# Altium PCB ArduinoUnoShield.PcbDoc
Units mil, origin at the board's own origin, x right, y up, seen from the top; angles counter-clockwise.
Board outline 2700 x 2100 mil, 2 copper layers (Top Layer, Bottom Layer); 25 components, 41 nets, 95 pads, 20 vias.
Unrouted connection lines stored in the file: 2.
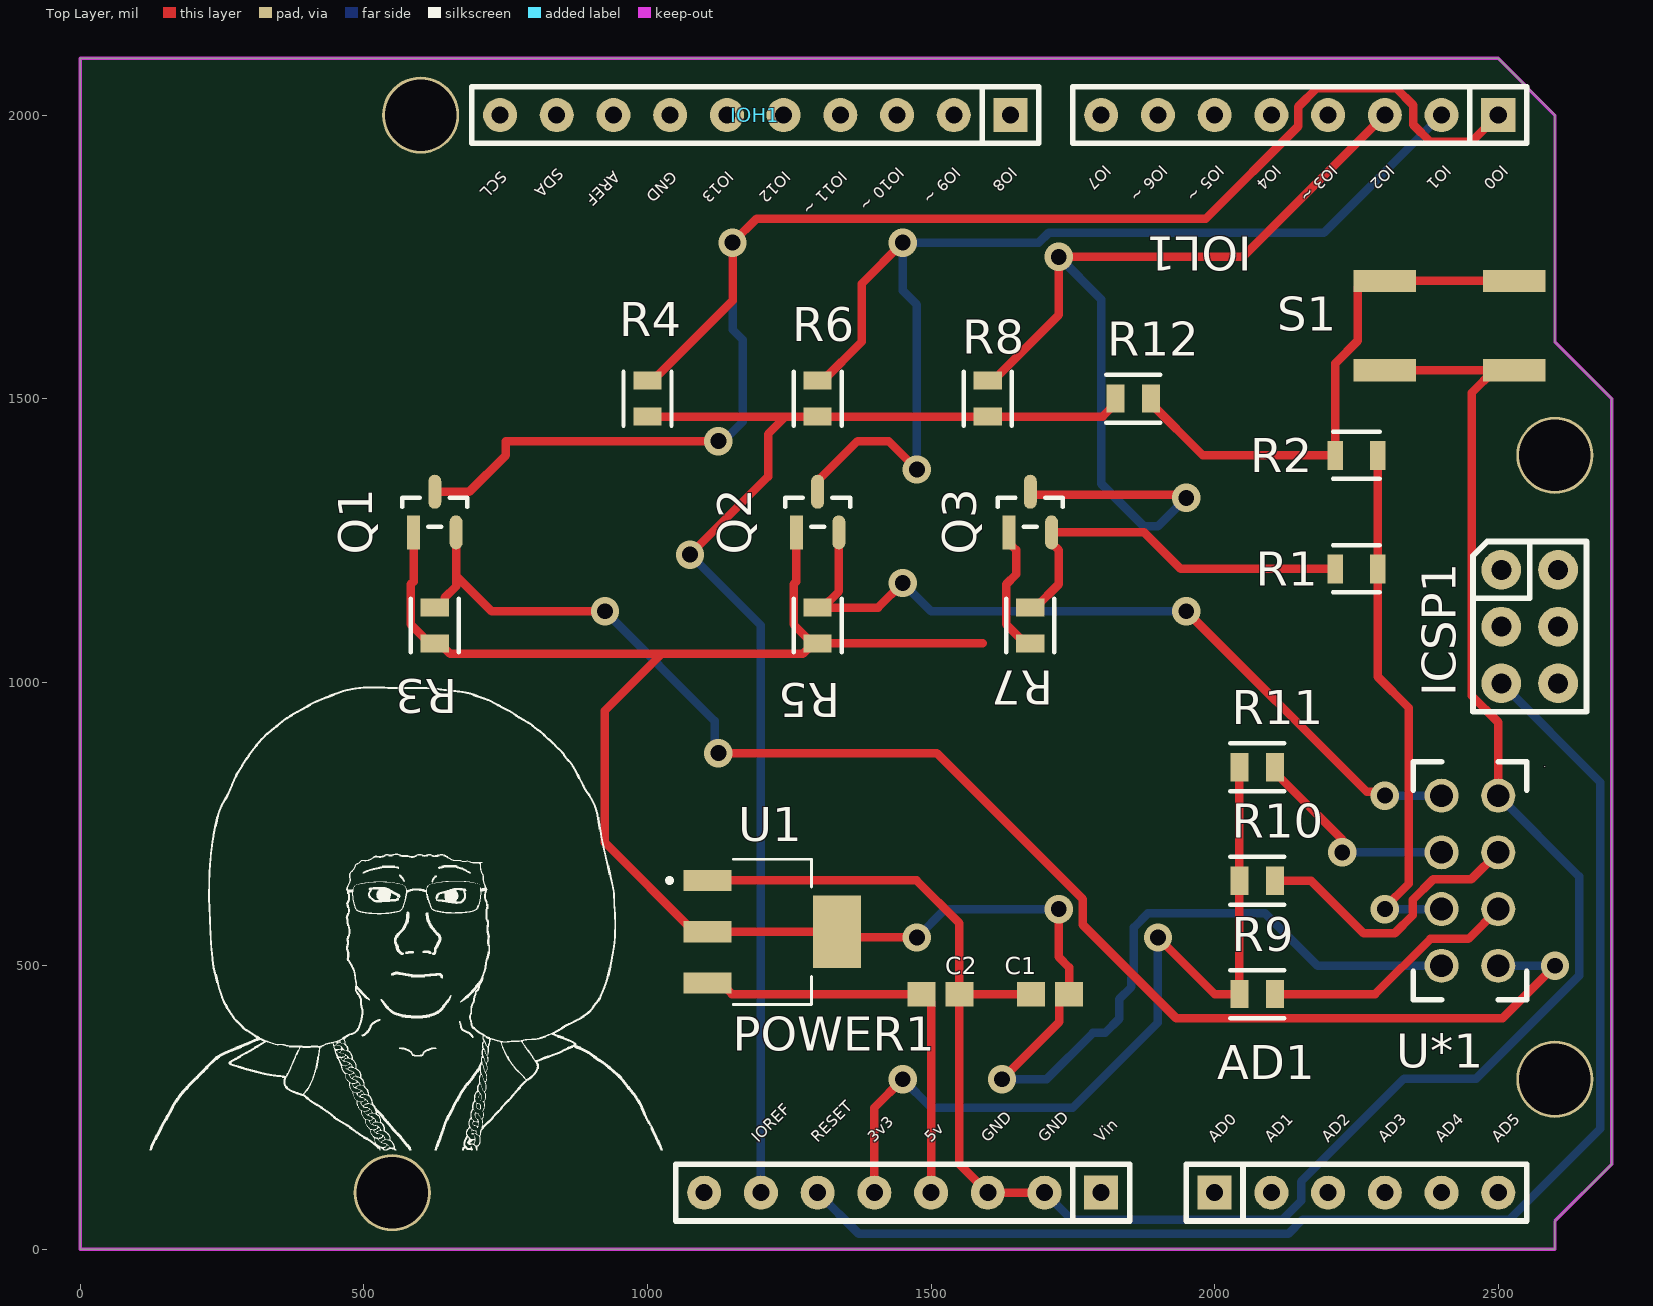
[diagram p0: Top Layer view]
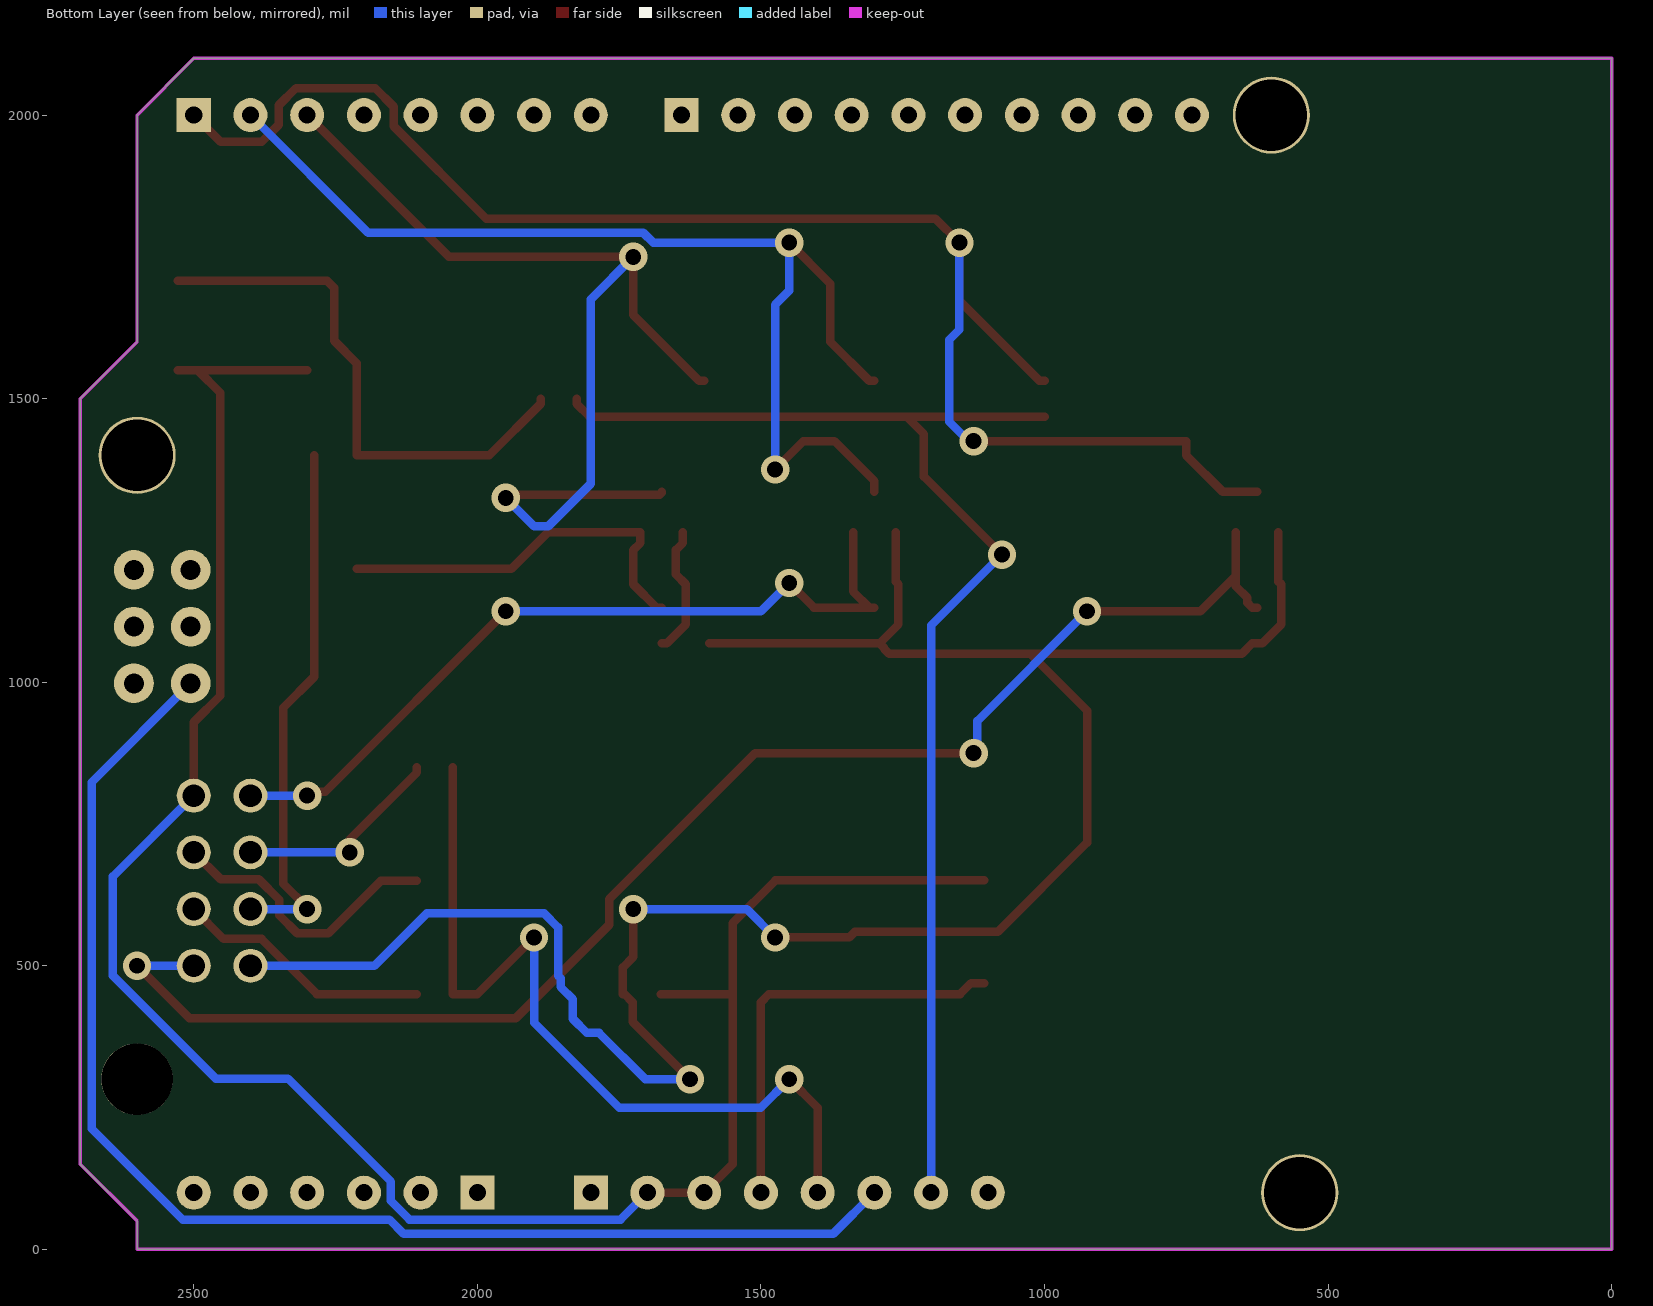
[diagram p1: Bottom Layer view, seen from below]
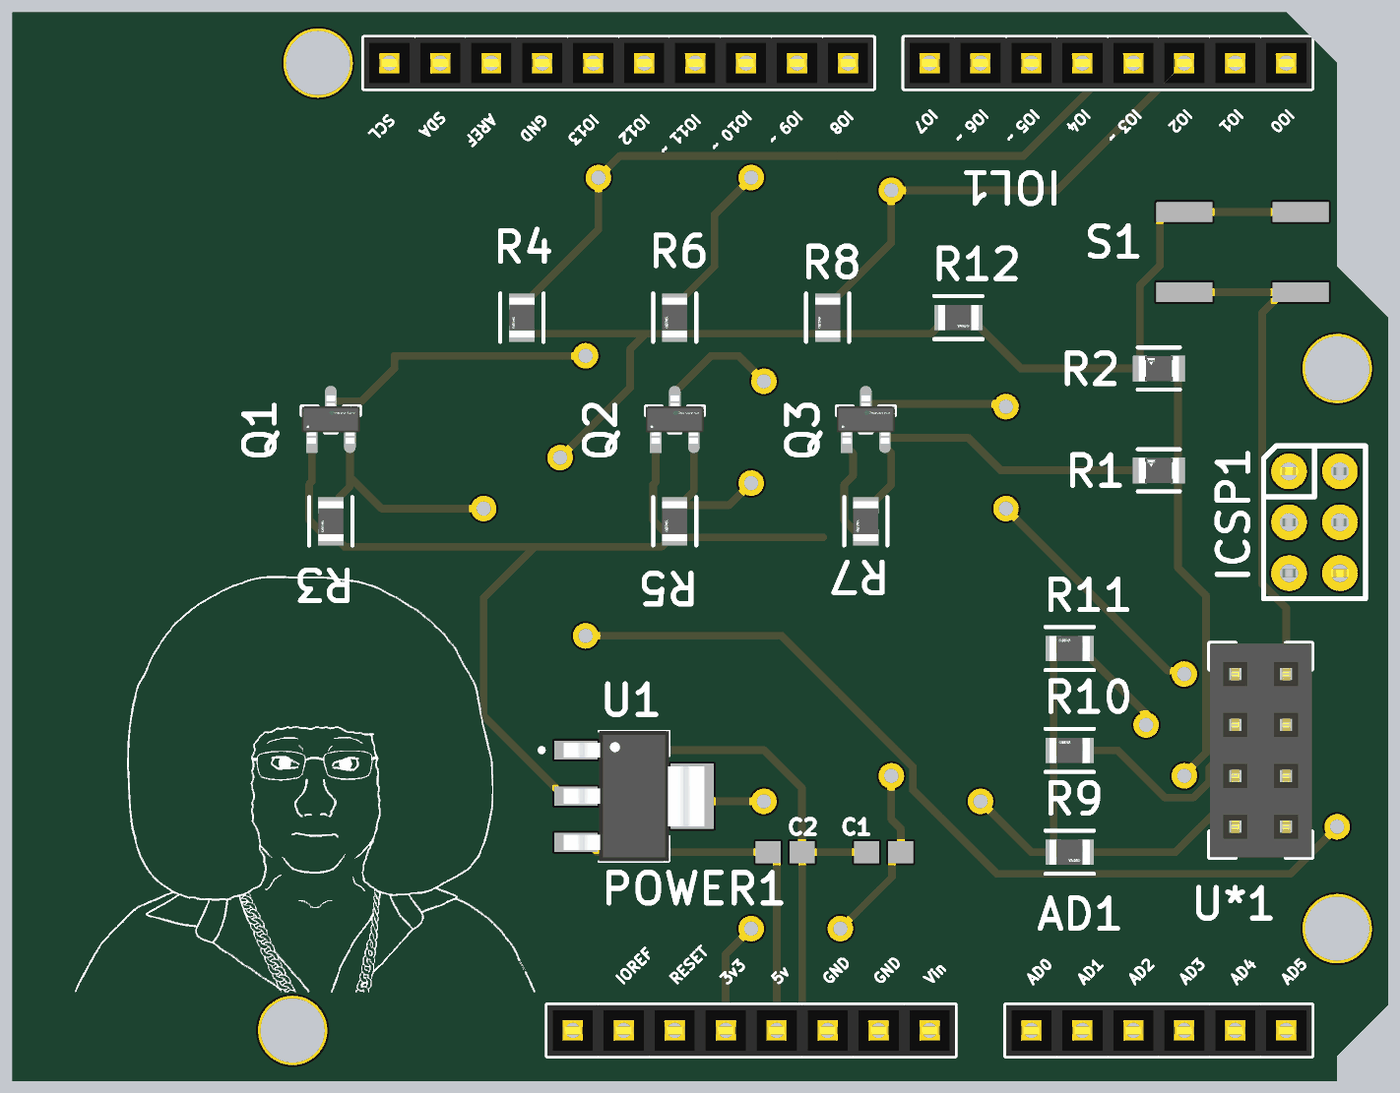
[diagram p2: 3D render of the assembled board from above, using the file's embedded part models]

## Layer stack, top to bottom
Top Solder: solder mask 0.4, Solder Resist, Dk 3.5
Top Layer: signal copper 1.4
Dielectric1: dielectric 12.6, FR-4, Dk 4.8
Bottom Layer: signal copper 1.4
Bottom Solder: solder mask 0.4, Solder Resist, Dk 3.5

## Board outline
0,0 0,2100 2500,2100 2600,2000 2600,1600 2700,1500 2700,150 2600,50 2600,0

## Design rules (kind name [scope] priority, off if disabled: settings)
Clearance [All] p1: gap=10 ignorepadtopadclearanceinfootprint=FALSE except(0: Arc-Hole Track-Hole SMDPad-Hole THPad-Hole Via-Hole Fill-Hole Poly-Hole Region-Hole Text-Hole)
HoleSize [All] p1: absolutevalues=TRUE maxlimit=150 minlimit=1 maxpercent=80.000 minpercent=20.000
PolygonConnect [All] p1: connectstyle=Relief reliefconductorwidth=10 reliefentries=4 polygonreliefangle="90 Angle" airgapwidth=10
RoutingVias [All] p1: holewidth=28 width=50 viastyle="Through Hole" minholewidth=28 minwidth=50 maxholewidth=28 maxwidth=50
SilkToSolderMaskClearance SilkscreenOverComponentPads [IsPad] p1: minsilkscreentomaskgap=10 clearancetoexposedcopper=TRUE
SolderMaskExpansion [All] p1: expansion=4 istentingtop=FALSE
SupplyNets "Schematic Supply Nets" [InNet('GND')] p1: voltage=0.000
Width [All] p1: maxlimit=20 minlimit=10 preferedwidth=15 minimp=50.000000 maximp=50.000000 favimp=50.000000
28 further rules are at their usual default settings.

## Classes and differential pairs
component class ArduinoUnoShield: IOH

## Components (designator, comment, footprint, x,y, rotation, side; value= is the part's Value field where it differs from the comment)
AD1 "AD" "Header 6x1 8.5mm" 2000,100 r0 top locked
C1 "C0603C105M9PACTU" CAPC1608X90X35ML15T15 1710,450 r0 top
C2 "C0603C105M9PACTU" CAPC1608X90X35ML15T15 1516.54,450 r180 top
ICSP1 "ICSP" ICSP 2505.51,1198.03 r0 top locked
IOH1 "IOH" "Header 10x1 8.5mm" 1640,2000 r180 top locked
IOL1 "IOL" "Header 8x1 8.5mm" 2500,2000 r180 top locked
POWER1 "POWER_UNO" "Header 8x1 8.5mm" 1800,100 r180 top locked
Q1 "BSS138" FP-318-08-IPC_B 625,1300 r90 top
Q2 "BSS138" FP-318-08-IPC_B 1300,1300 r90 top
Q3 "BSS138" FP-318-08-IPC_B 1675,1300 r90 top
R1 "CRCW08050000Z0ECC" FP-CRCW0805-Ce3-MFG 2250,1200 r0 top
R2 "CRCW08050000Z0ECC" FP-CRCW0805-Ce3-MFG 2250,1400 r0 top
R3 "AT0805BRE0710KL" FP-AT0805-IPC_C 625,1100 r270 top
R4 "AT0805BRE0710KL" FP-AT0805-IPC_C 1000,1500 r270 top
R5 "AT0805BRE0710KL" FP-AT0805-IPC_C 1300,1100 r270 top
R6 "AT0805BRE0710KL" FP-AT0805-IPC_C 1300,1500 r270 top
R7 "AT0805BRE0710KL" FP-AT0805-IPC_C 1675,1100 r270 top
R8 "AT0805BRE0710KL" FP-AT0805-IPC_C 1600,1500 r270 top
R9 "AT0805BRE0710KL" FP-AT0805-IPC_C 2075,450 r0 top
R10 "AT0805BRE0710KL" FP-AT0805-IPC_C 2075,650 r180 top
R11 "AT0805BRE0710KL" FP-AT0805-IPC_C 2075,850 r180 top
R12 "AT0805BRE0710KL" FP-AT0805-IPC_C 1856.57,1500 r0 top
S1 "KSC221J" "ITT Cannon KSC2 Series" 2300,1550 r0 top
U1 "TLV1117LV33DCYR" VREG_TLV1117LV33DCYR 1220,560 r0 top
U*1 "ESP8266 Module" "Copy of ESP8266 2x4 Connector" 2400,800 r270 top

## Footprints (in the part's own frame and the unit in brackets; to place one, negate y for a bottom-side part, rotate by r counter-clockwise, add the part's x,y. Pads: shape width x height; smd on the part's side, far side on the other; paste and mask are expansions set on the pad)
CAPC1608X90X35ML15T15 [mm] "Chip Capacitor, 2-Leads, Body 1.60x0.81mm, IPC Low Density"
  rect 1.25x1.1 smd: 1(-0.85,0) 2(0.85,0)
  body extent -0.88,-0.48 0.87,0.48, height 0.9
"Copy of ESP8266 2x4 Connector" [mil]
  round 60 hole 40: 1(0,100) 2(0,0) 3(100,100) 4(100,0) 5(200,100) 6(200,0) 7(300,100) 8(300,0)
  silkscreen extent -60,-50 360,150, body extent -60,-50 360,150, height 335
FP-318-08-IPC_B [mm]
  rect 1.524x0.578 smd paste+0 mask+0: 1(-0.91,0.95)
  rrect100% 1.524x0.578 smd paste+0 mask+0: 2(-0.91,-0.95) 3(0.91,0)
  silkscreen extent -0.65,-1.45 0.65,1.45, body extent -1.92,-1.7 1.92,1.7, height 0.25
FP-AT0805-IPC_C [mil]
  rect 31.82x49.69 smd paste+0 mask+0: 1(-31.57,0) 2(31.57,0)
  silkscreen extent -47,-42 47,42, body extent -51,-31 51,31, height 10
FP-CRCW0805-Ce3-MFG [mm]
  rect 0.7x1.3 smd paste+0 mask+0: 1(-0.95,0) 2(0.95,0)
  silkscreen extent -1.05,-1.05 1.05,1.05, body extent -1.4,-0.8 1.4,0.8, height 0.25
"Header 6x1 8.5mm" [mil] "Stackable 6 pin header"
  rect 60x60 hole 30: 1(0,0)
  round 60 hole 30: 2(100,0) 3(200,0) 4(300,0) 5(400,0) 6(500,0)
  silkscreen extent -50,-50 550,50, body extent -50,-50 550,50, height 335
"Header 8x1 8.5mm" [mil] "Stackable 8 pin header"
  rect 60x60 hole 30: 1(0,0)
  round 60 hole 30: 2(100,0) 3(200,0) 4(300,0) 5(400,0) 6(500,0) 7(600,0) 8(700,0)
  silkscreen extent -50,-50 750,50, body extent -50,-50 750,50, height 335
"Header 10x1 8.5mm" [mil] "Stackable 10 pin header"
  rect 60x60 hole 30: 1(0,0)
  round 60 hole 30: 2(100,0) 3(200,0) 4(300,0) 5(400,0) 6(500,0) 7(600,0) 8(700,0) 9(800,0) 10(900,0)
  silkscreen extent -50,-50 950,50, body extent -50,-50 950,50, height 335
ICSP [mil]
  round 70 hole 35.43: 1(0,0) 2(100,0) 3(0,-100) 4(100,-100) 5(0,-200) 6(100,-200)
  silkscreen extent -50,-250 150,50, body extent -50,-250 150,50, height 485
"ITT Cannon KSC2 Series" [mm] "SWITCH TACT SILVER J-LEAD"
  rect 2.8x1 smd: 1(0,0) 1(5.8,0) 2(0,4) 2(5.8,4)
  body extent -0.5,-1.4 6.3,5.4, height 3.55
VREG_TLV1117LV33DCYR [mm]
  rect 2.15x0.95 smd: 1(-2.9,2.3) 2(-2.9,0) 3(-2.9,-2.3)
  rect 2.15x3.25 smd: 4(2.9,0)
  silkscreen extent -4.7,-3.25 1.75,3.25, body extent -3.5,-3.25 3.5,3.25, height 1.8

## Part data
AD1: Supplier Part Number 1=2699089, Supplier 1=Arrow, Supplier 2=Digi-Key, Supplier 3=Arrow, Supplier 4=Arrow, Supplier Part Number 2=SAM1198-06-ND, Supplier Part Number 3=2699088, Supplier Part Number 4=2699075
C1 C2: library part CMP-1035-02731-2, Manufacturer=Kemet, Part Number=C0603C105M9PACTU
ICSP1: Supplier Part Number 1=2699117, Supplier 1=Arrow, Supplier 2=Arrow, Supplier 3=Digi-Key, Supplier 4=Arrow, Supplier 5=Digi-Key, Supplier Part Number 2=2699116, Supplier Part Number 3=SAM1185-06-ND, Supplier Part Number 4=2699091, Supplier Part Number 5=SAM1196-06-ND
IOH1: Supplier Part Number 1=2698803S4475693N1004, Supplier 1=Arrow, Supplier 2=Digi-Key, Supplier 3=Arrow, Supplier Part Number 2=SAM1198-10-ND, Supplier Part Number 3=2698789
IOL1 POWER1: Supplier Part Number 1=SAM1198-08-ND, Supplier 1=Digi-Key, Supplier 2=Arrow, Supplier 3=Arrow, Supplier 4=Arrow, Supplier Part Number 2=2698939, Supplier Part Number 3=2698940, Supplier Part Number 4=2698925
Q1 Q2 Q3: library part CMP-07173-000101-1, "MOSFET N-CH 50V 220MA SOT-23", Case/Package=SOT-23, Continuous Drain Current (ID)=220mA, Drain to Source Breakdown Voltage=50V, Drain to Source Resistance=3.5R, Gate to Source Voltage (Vgs)=20V, Input Capacitance=27pF, Max Operating Temperature=150°C, Max Power Dissipation=360mW, Min Operating Temperature=-55°C, On-State Resistance=6R, Package Quantity=1, Threshold Voltage=1.3V, Contact Plating=Tin, Current Rating=220mA, Drain to Source Voltage (Vdss)=50V, Dual Supply Voltage=50V, Element Configuration=Single, Fall Time=9ns, Height=0.93mm, Lead Free="Lead Free", Length=2.92mm, Mount="Surface Mount", Nominal Vgs=1.3V, Number of Elements=1, Number of Pins=3, Packaging="Tape and Reel", Power Dissipation=360mW, Radiation Hardening=No, Rds On Max=3.5R, REACH SVHC="No SVHC", Rise Time=9ns, Termination=SMD/SMT, Turn-Off Delay Time=20ns, Turn-On Delay Time=2.5ns, Voltage Rating (DC)=50V, Weight=0.03g, Width=1.3mm
R1 R2: library part CMP-00030-87884303-1, "CRCW08050000Z0ECC CRCW Thick Film Commodity Chip Resistor Jumper 0805 Size 0 Ohm 0.125 W 2-Pin SMD Paper T/R", Case/Package=0805, Max Operating Temperature=155°C, Min Operating Temperature=-55°C, Power Rating=125mW, Resistance=0Ω, Voltage Rating=150V, Composition="Thick Film", Height=600µm, Lead Free="Lead Free", NexarPartId=87884303, RoHS=Compliant
R3 R4 R5 R6 R7 R8 R9 R10 R11 R12: library part CMP-03412-048709-1, "Thin Film Chip Resistors Automotive Grade 10kΩ 0.1% 50ppm/°C 0805"
S1: library part CMP-339-000013-1, "SWITCH TACT SILVER J-LEAD", Manufacturer 1="ITT Cannon", GFUPartNo=KSC221J, Manufacturer Part Number 1=KSC221J, Part Type=SMT
U1: library part CMP-550-000000-1, "1-A, low-dropout voltage regulator", Package="SOT-223-4 Texas Instruments", Check_prices=https://www.snapeda.com/parts/TLV1117LV33DCYR/Texas+Instruments/view-part/?ref=eda, Component Type=Standard, Design Item ID=TLV1117LV33DCYR, Digi-Key_Part_Number=296-28778-2-ND, MF="Texas Instruments", MP=TLV1117LV33DCYR, Pin Count=4, Purchase-URL=https://pricing.snapeda.com/search/part/TLV1117LV33DCYR/?ref=eda, SnapEDA_Link=https://www.snapeda.com/parts/TLV1117LV33DCYR/Texas+Instruments/view-part/?ref=snap, Source=TLV1117LV33DCYR.SchLib
U*1: library part CMP-006-0011-1, "ESP8266 2x4 Module", Design Item ID="ESP8266 2x4 Connector", Source=ESP8266Connector.SchLib

## Free pads (board coordinates)
  round 135.98 hole 125.98: 0(550,100) 0(600,2000) 0(2600,1400)
  round 135.98 / inner round 125.98 / far side round 125.98 hole 125.98: 0(2600,300)

## Via types
v1: diameter 50, hole 28, Top Layer to Bottom Layer, 20 vias

## Nets (pads, with @x,y where several pads share a name; then routed paths per layer and width w, separated by ;. In a path a pad name is that pad's centre, name@x,y a point inside that pad or via, vN(x,y) a via of type N, cw(c..) or ccw(c..) an arc to the next point about the centre after c; other vN are vias at no path point)
3V3: POWER1.5 R9.1 R10.2 R11.2 | length 1488.4
  Top Layer w15: POWER1.5 1400,250 v1(1450,300) ; v1(1900,550) 2000,450 R9.1 R10.2 R11.2
  Bottom Layer w15: v1(1450,300) 1500,250 1750,250 1900,400 v1(1900,550)
5V: C2.2 POWER1.4 U1.3 | length 743.9
  Top Layer w15: U1.3 1129.45,469.45 1148.9,450 C2.2 1485.85,450 1500,435.85 POWER1.4
AD0: AD1.1
AD1: AD1.2
AD2: AD1.3
AD3: AD1.4
AD4: AD1.5
AD5: AD1.6
AREF: IOH1.8
"ESP 3v3": C1.2 Q1.1 Q2.1 Q3.1 R3.2 R5.2 R7.2 U1.2 U1.4 U*1.8 | length 4281.3
  Top Layer w15: Q1.1 587.6,1177.51 582.65,1172.57 582.65,1101.83 616.06,1068.43 633.94,1068.43 652.36,1050 1025,1050 ; Q2.1 1262.6,1177.51 1257.65,1172.57 1257.65,1101.83 R5.2@1291.06,1068.43 ; v1(1475,550) 1344.17,550 U1.4 U1.2 1082.2,560 925,717.2 925,950 1025,1050 ; 1591.06,1068.43 R5.2 R5.2@1291.06,1068.43 ; v1(1625,300) 1726.36,401.36 1726.36,435.85 1740.51,450 C1.2 1743.46,497.07 1725,515.53 v1(1725,600) ; Q3.1 1637.6,1245.54 1650,1233.14 1650,1189.91 1632.65,1172.57 1632.65,1101.83 1666.06,1068.43 R7.2 ; 1025,1050 1273.87,1050 1282.65,1058.79 1282.65,1060.02 R5.2@1291.06,1068.43
  Bottom Layer w15: v1(1475,550) 1525,600 v1(1725,600) ; v1(1625,300) 1703.78,300 1785.48,381.7 1806.7,381.7 1831.7,406.7 1831.7,441.17 1853.35,462.82 1853.35,478.35 1857.5,482.5 1857.5,567.6 1882.4,592.5 2088.86,592.5 2181.36,500 U*1.8
"ESP Reset": R1.2 R2.2 U*1.6 | length 940.4
  Top Layer w15: R2.2 2287.4,1009.7 2342.5,954.6 2342.5,645.03 2300,602.53 v1(2300,600)
  Bottom Layer w15: v1(2300,600) U*1.6
GND: C1.1 C2.1 IOH1.7 POWER1.2 POWER1.3 S1.1 U1.1 U*1.1 | length 3784.5
  Top Layer w15: U1.1 1474.45,650.55 1549.74,575.26 1549.74,450.26 C2.1 ; C1.1 C2.1 ; POWER1.2 POWER1.3 1550,150 C2.1 ; S1.1@2300,1550 2528.35,1550 2492.91,1550 2453.01,1510.1 2453.01,976.29 2500,929.3 U*1.1
  Bottom Layer w15: POWER1.2 1747.5,52.5 2119.68,52.5 2152.5,85.32 2152.5,119.68 2333.86,301.04 2461.14,301.04 2642.5,482.4 2642.5,657.5 U*1.1
IO0: IOL1.1 Q1.3 R4.1 | length 2805.2
  Top Layer w15: Q1.3 685.83,1335.83 750,1400 750,1425 v1(1125,1425) ; R4.1 1008.94,1531.57 1150,1672.64 v1(1150,1775) 1192.5,1817.5 1984.68,1817.5 2147.5,1980.32 2147.5,2014.68 2180.32,2047.5 2319.68,2047.5 2350,2017.18 2350,1982.82 2380.32,1952.5 2452.5,1952.5 IOL1.1
  Bottom Layer w15: v1(1125,1425) 1133.82,1425 1168.3,1459.48 1168.3,1603.35 1150,1621.66 v1(1150,1775)
IO1: IOL1.2 Q2.3 R6.1 | length 2007.9
  Top Layer w15: Q2.3 1300,1354.46 1370.54,1425 1425,1425 v1(1475,1375) ; R6.1 1308.94,1531.57 1377.96,1600.59 1377.96,1702.96 v1(1450,1775)
  Bottom Layer w15: v1(1475,1375) 1475,1665.53 1450,1690.53 v1(1450,1775) 1689.9,1775 1707.4,1792.5 2192.5,1792.5 IOL1.2
IO2: IOL1.3 Q3.3 R8.1 | length 1867.4
  Top Layer w15: R8.1 1608.94,1531.57 1725,1647.64 v1(1725,1750) 2050,1750 IOL1.3 ; Q3.3 1675,1334 1678.58,1330.42 1944.58,1330.42 v1(1950,1325)
  Bottom Layer w15: v1(1725,1750) 1800,1675 1800,1350 1875,1275 1900,1275 v1(1950,1325)
IO3: IOL1.4
IO4: IOL1.5
IO5: IOL1.6
IO6: IOL1.7
IO7: IOL1.8
IO8: IOH1.1
IO9: IOH1.2
IO10: IOH1.3
IO11: IOH1.4
IO12: IOH1.5
IO13: IOH1.6
IOREF: POWER1.7 R4.2 R6.2 R8.2 R12.1 | length 2333.3
  Top Layer w15: R4.2 1243.43,1468.43 ; v1(1075,1225) 1212.56,1362.56 1212.56,1437.56 1243.43,1468.43 ; R12.1 1825,1491.06 1802.36,1468.43 R8.2 R6.2 1243.43,1468.43
  Bottom Layer w15: v1(1075,1225) 1200,1100 POWER1.7
"L Reset": Q3.2 R1.1 R7.1 | length 690.5
  Top Layer w15: R7.1 1683.94,1131.57 1725,1172.64 1725,1232.87 1712.4,1245.47 Q3.2 1875.73,1264.17 1939.9,1200 R1.1
"L RX": Q2.2 R5.1 U*1.2 | length 1417.7
  Top Layer w15: R5.1 R5.1@1308.94,1131.57 ; Q2.2 1337.4,1160.04 R5.1@1308.94,1131.57 ; v1(1450,1175) 1406.57,1131.57 R5.1@1308.94,1131.57 ; v1(1950,1125) 2268.3,806.7 2293.3,806.7 v1(2300,800)
  Bottom Layer w15: v1(1450,1175) 1500,1125 v1(1950,1125) ; v1(2300,800) U*1.2
"L TX": Q1.2 R3.1 U*1.7 | length 2608.1
  Top Layer w15: R3.1 633.94,1131.57 642.35,1139.98 642.35,1148.92 662.4,1168.98 662.4,1187.6 ; Q1.2 662.4,1187.6 ; v1(925,1125) 725,1125 662.4,1187.6 ; v1(1125,875) 1510.1,875 1767.5,617.6 1767.5,572.4 1932.4,407.5 2507.5,407.5 v1(2600,500)
  Bottom Layer w15: v1(925,1125) 1118.3,931.7 1118.3,881.7 v1(1125,875) ; U*1.7 v1(2600,500)
MISO: ICSP1.1
MOSI: ICSP1.4
NetR2_1: R2.1 R12.2 S1.2 | length 963.9
  Top Layer w15: R12.2 1888.15,1491.06 1979.21,1400 R2.1 2212.6,1562.15 2252.38,1601.93 2252.38,1695.29 2264.57,1707.48 2300,1707.48 S1.2@2528.35,1707.48
NetR9_2: R9.2 U*1.5 | length 455.6
  Top Layer w15: R9.2 2282.82,450 2380.32,547.5 2447.5,547.5 U*1.5
NetR10_1: R10.1 U*1.3 | length 506.7
  Top Layer w15: R10.1 2170.04,650 2262.54,557.5 2317.6,557.5 2348.96,588.86 2348.96,616.14 2385.32,652.5 2452.5,652.5 U*1.3
NetR11_1: R11.1 U*1.4 | length 374.1
  Top Layer w15: R11.1 2106.57,841.06 2225,722.64 v1(2225,700)
  Bottom Layer w15: v1(2225,700) U*1.4
RESET: ICSP1.5 POWER1.6 | length 2343.9
  Bottom Layer w15: POWER1.6 1372.5,27.5 2130.03,27.5 2155.03,52.5 2519.68,52.5 2679.5,212.32 2679.5,824.04 ICSP1.5
SCK: ICSP1.3
SCL: IOH1.10
SDA: IOH1.9
VIN: POWER1.1
pads on no net: ICSP1.2 ICSP1.6 POWER1.8

## Polygon pours and split planes (outlines as drawn)
no net on Bottom Layer "NONET_L02_P000" (solid, shelved, pour order 0): 0,0 0,2100 2500,2100 2600,2000 2600,1600 2700,1500 2700,150 2600,50 2600,0

## Keep-outs
Keep-Out Layer:
  the board outline again, w6

## Silkscreen, mask and mechanical layers (free items; w line width, h text height)
Top Overlay:
  drawing of 28 lines, arcs and shapes, not listed
  text "IO7" at 1805,1912.93 h20 r225
  text "IO6 ~" at 1905,1912.93 h20 r225
  text "IO5 ~" at 2005,1912.93 h20 r225
  text "IO4" at 2105,1912.93 h20 r225
  text "IO3 ~" at 2205,1912.93 h20 r225
  text "IO2" at 2305,1912.93 h20 r225
  text "IO1" at 2405,1912.93 h20 r225
  text "IO0" at 2505,1912.93 h20 r225
  text "IO10 ~" at 1440,1910 h20 r225
  text "IO9 ~" at 1540,1910 h20 r225
  text "IO8" at 1640,1910 h20 r225
  text "SDA" at 840,1907.93 h20 r225
  text "SCL" at 740,1902.93 h20 r225
  text "AREF" at 940,1902.93 h20 r225
  text "GND" at 1040,1902.93 h20 r225
  text "IO13" at 1140,1902.93 h20 r225
  text "IO12" at 1240,1902.93 h20 r225
  text "IO11 ~" at 1340,1902.93 h20 r225
  text "." at 2580,850 h10
  text "IOREF" at 1195,187.07 h20 r45
  text "RESET" at 1300,187.07 h20 r45
  text "3v3" at 1400,187.07 h20 r45
  text "5v" at 1500,187.07 h20 r45
  text "GND" at 1600,187.07 h20 r45
  text "GND" at 1700,187.07 h20 r45
  text "Vin" at 1800,187.07 h20 r45
  text "AD0" at 2000,187.07 h20 r45
  text "AD1" at 2100,187.07 h20 r45
  text "AD2" at 2200,187.07 h20 r45
  text "AD3" at 2300,187.07 h20 r45
  text "AD4" at 2400,187.07 h20 r45
  text "AD5" at 2500,187.07 h20 r45
Mechanical 1:
  circle w5: c600,2000 r62.99
  circle w5: c2600,300 r62.99
  circle w5: c550,100 r62.99
  circle w5: c2600,1400 r62.99
  lines w5: 0,0 0,2100 2500,2100 2600,2000 2600,1600 2700,1500 2700,150 2600,50 2600,0 0,0